# EAGLE board avr-grundschaltung (EAGLE 4.16)
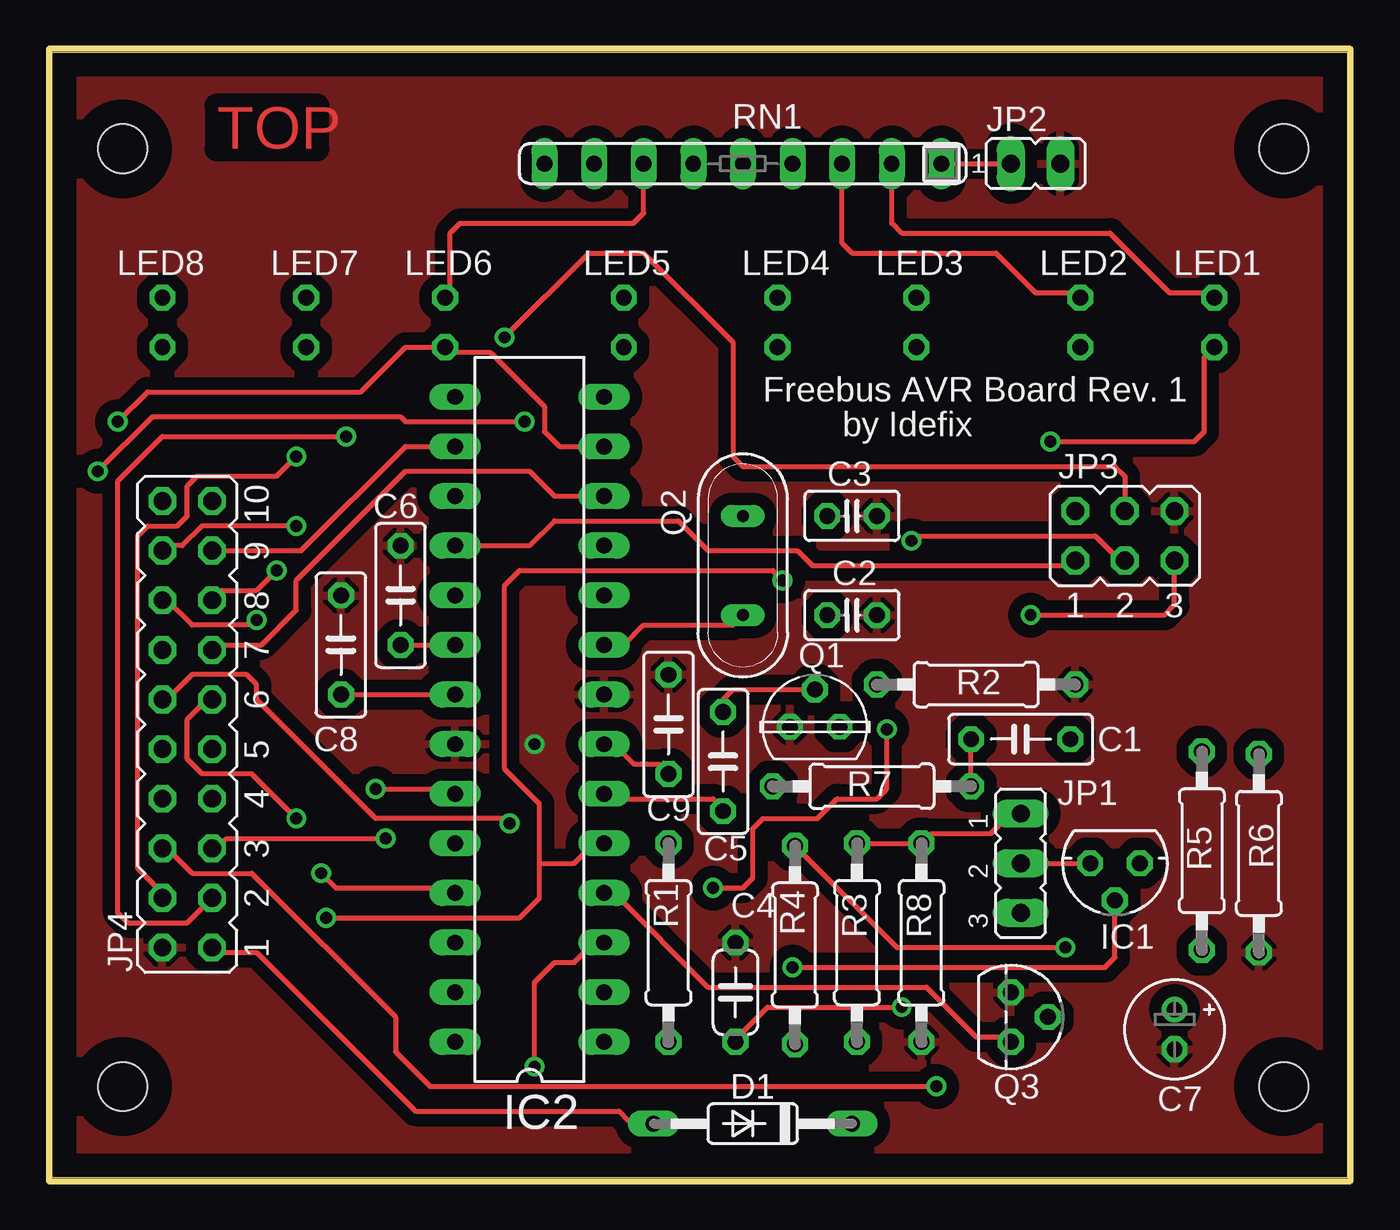
[diagram p0: board, top side]
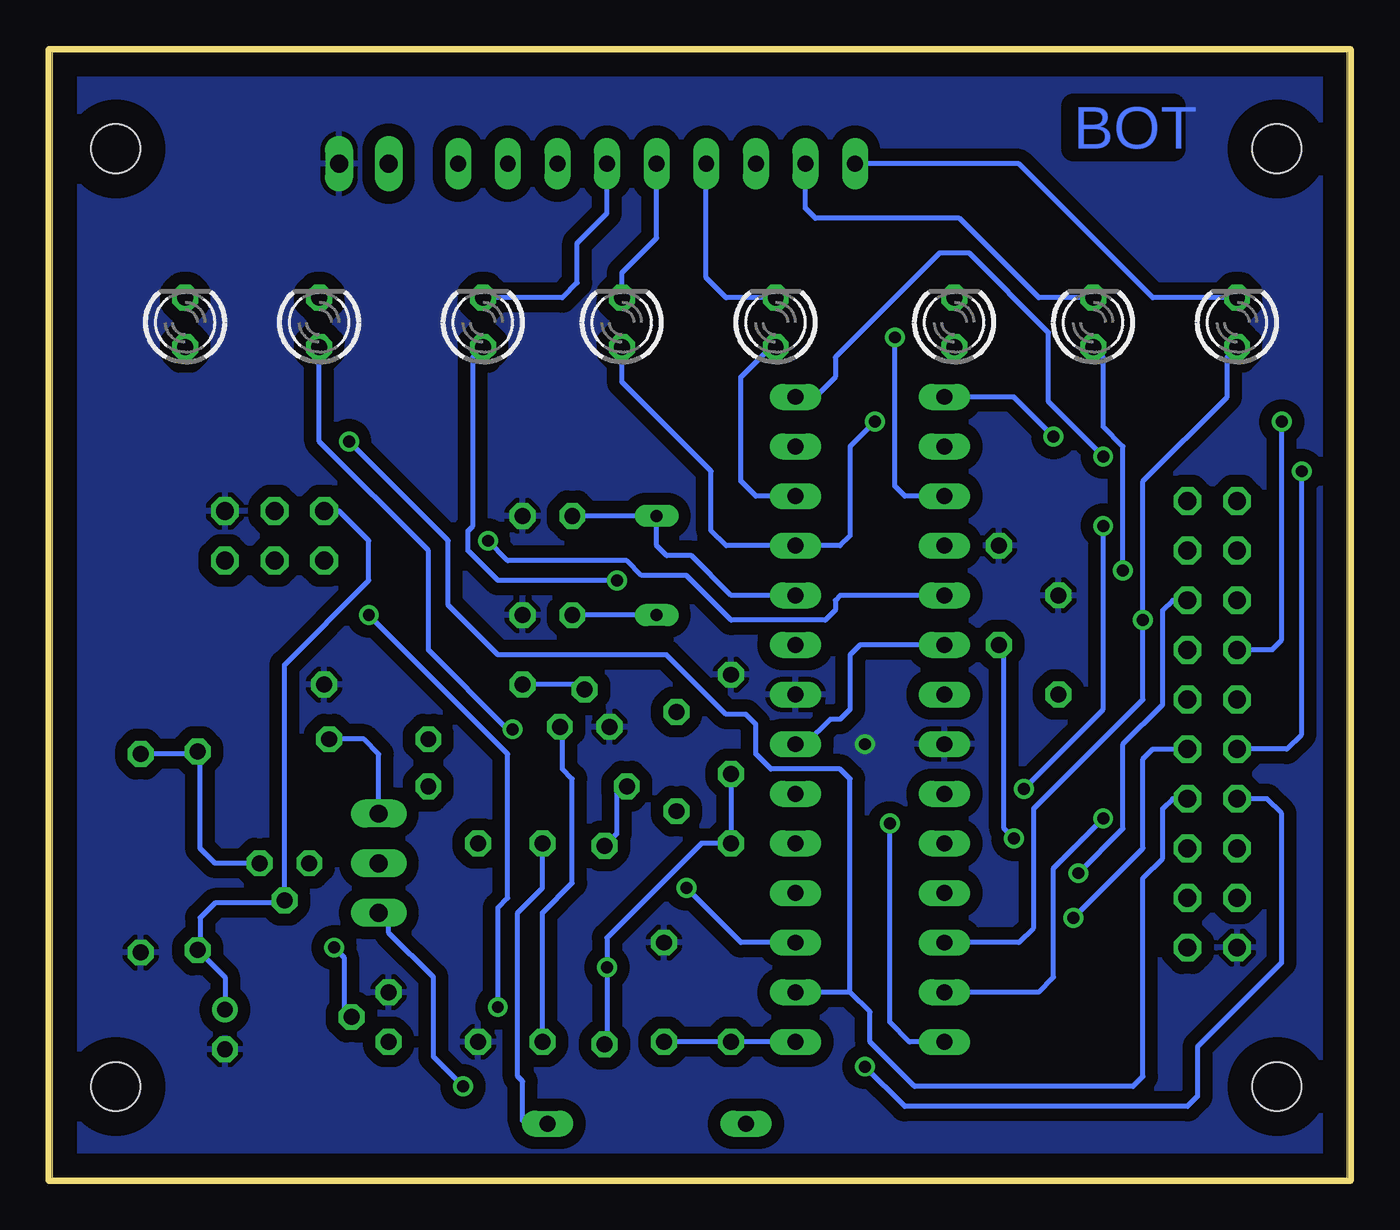
[diagram p1: board, bottom side, seen from below]

Size 66.65 x 57.97 mm. Coordinates in mm from the lower left corner, seen from the top.
Outline: 0,57.97 0,0 66.65,0 66.65,57.97 0,57.97
Copper layers (1*16): Top 0.035mm / dielectric 1.5mm / Bottom 0.035mm
Design rules "freebus-default": minimum track width 10mil, minimum drill 24mil, track to track 25mil, track to pad 15mil, pad to pad 8mil, via to via 50mil, smd to smd 8mil, copper to edge 50mil, drill to drill 50mil, minimum pad ring 10mil, minimum via ring 8mil, stop-mask expansion 4mil, vias tented up to drill 0mil, thermal gap 10mil
Holes 2.5 mm at 3.78,4.84 3.78,52.85 63.22,4.84 63.22,52.85
Milling: 4 lines

## Footprints (pad centres in the part's own frame; a part is rotated, then mirrored left to right if it is on the bottom)
C050-025X075 = drill 0.813 octagon: 1 -2.54,0; 2 2.54,0
C025-025X050 = drill 0.813 octagon: 1 -1.27,0; 2 1.27,0
C050-024X044 = drill 0.813 octagon: 1 -2.54,0; 2 2.54,0
E2-5 = drill 0.813 pad 1.27 round: + -1.016,0 | drill 0.813 pad 1.27 octagon: - 1.016,0
DO35-10 = drill 0.813 long: A 5.08,0; C -5.08,0
317L = drill 0.813 octagon: 1 -1.27,0; 2 0,1.905; 3 1.27,0
DIL28-3 = drill 0.813 long: 1 -16.51,-3.81; 2 -13.97,-3.81; 3 -11.43,-3.81; 4 -8.89,-3.81; 5 -6.35,-3.81; 6 -3.81,-3.81; 7 -1.27,-3.81; 8 1.27,-3.81; 9 3.81,-3.81; 10 6.35,-3.81; 11 8.89,-3.81; 12 11.43,-3.81; 13 13.97,-3.81; 14 16.51,-3.81; 15 16.51,3.81; 16 13.97,3.81; 17 11.43,3.81; 18 8.89,3.81; 19 6.35,3.81; 20 3.81,3.81; 21 1.27,3.81; 22 -1.27,3.81; 23 -3.81,3.81; 24 -6.35,3.81; 25 -8.89,3.81; 26 -11.43,3.81; 27 -13.97,3.81; 28 -16.51,3.81
JP2 = drill 0.914 long: 1 -2.54,0; 2 0,0; 3 2.54,0
JP1 = drill 0.914 long: 1 0,-1.27; 2 0,1.27
JP3Q = drill 0.914 octagon: 1 -2.54,-1.27; 2 -2.54,1.27; 3 0,-1.27; 4 0,1.27; 5 2.54,-1.27; 6 2.54,1.27
JP10Q = drill 0.914 octagon: 1 -11.43,-1.27; 2 -11.43,1.27; 3 -8.89,-1.27; 4 -8.89,1.27; 5 -6.35,-1.27; 6 -6.35,1.27; 7 -3.81,-1.27; 8 -3.81,1.27; 9 -1.27,-1.27; 10 -1.27,1.27; 11 1.27,-1.27; 12 1.27,1.27; 13 3.81,-1.27; 14 3.81,1.27; 15 6.35,-1.27; 16 6.35,1.27; 17 8.89,-1.27; 18 8.89,1.27; 19 11.43,-1.27; 20 11.43,1.27
LED3MM = drill 0.813 octagon: A -1.27,0; K 1.27,0
TO237 = drill 0.813 octagon: 1 1.27,0; 2 0,1.905; 3 -1.27,0
QS = drill 0.61 long: 1 -2.54,0; 2 2.54,0
TO92 = drill 0.813 octagon: 1 1.27,0; 2 0,1.905; 3 -1.27,0
0207/10 = drill 0.813 octagon: 1 -5.08,0; 2 5.08,0
SIL9 = drill 0.813 long: 1 -10.16,0; 2 -7.62,0; 3 -5.08,0; 4 -2.54,0; 5 0,0; 6 2.54,0; 7 5.08,0; 8 7.62,0; 9 10.16,0

## Placement (x,y rotation side)
C1  100n  [C050-025X075]  49.76,22.62 180 top
C2  33p  [C025-025X050]  41.12,28.97 180 top
C3  33p  [C025-025X050]  41.12,34.05 180 top
C4  47n  [C050-024X044]  35.15,9.67 270 top
C5  100n  [C050-025X075]  34.52,21.48 270 top
C6  100n  [C050-025X075]  18.01,29.99 90 top
C7  1u  [E2-5]  57.63,7.76 270 top
C8  100n  [C050-025X075]  14.96,27.45 90 top
C9  100n  [C050-025X075]  31.72,23.39 270 top
D1  1N4148  [DO35-10]  36.04,2.94 180 top
IC1  LM317  [317L]  54.58,16.27 180 top
IC2  MEGA8-P  [DIL28-3]  24.61,23.64 90 top
JP1  [JP2]  49.76,16.27 270 top
JP2  [JP1]  50.52,52.09 270 top
JP3  [JP3Q]  55.09,33.04 0 top
JP4  [JP10Q]  7.08,23.39 90 top
LED1  [LED3MM]  59.66,43.96 90 bottom
LED2  [LED3MM]  52.8,43.96 90 bottom
LED3  [LED3MM]  44.42,43.96 90 bottom
LED4  [LED3MM]  37.31,43.96 90 bottom
LED5  [LED3MM]  29.44,43.96 90 bottom
LED6  [LED3MM]  20.29,43.96 90 bottom
LED7  [LED3MM]  13.18,43.96 90 bottom
LED8  [LED3MM]  5.81,43.96 90 bottom
Q1  2N7000  [TO237]  39.21,23.26 0 top
Q2  8,000  [QS]  35.53,31.51 270 top
Q3  BC557  [TO92]  49.25,8.4 270 top
R1  10k  [0207/10]  31.72,12.21 270 top
R2  470k  [0207/10]  47.47,25.42 180 top
R3  68R  [0207/10]  41.37,12.21 270 top
R4  47k  [0207/10]  38.2,12.08 90 top
R5  430R  [0207/10]  59.03,16.91 90 top
R6  550R  [0207/10]  61.95,16.78 270 top
R7  10k  [0207/10]  42.14,20.21 180 top
R8  100k  [0207/10]  44.68,12.21 270 top
RN1  470R  [SIL9]  35.53,52.09 180 top

## Library data of the parts
C1-C9 R1-R8 = rcl
D1 = diode
IC1 = v-reg
IC2 = atmel
JP1-JP4 = jumper
LED1-LED8 = led
Q1 = transistor-fet
Q2 = special
Q3 = transistor-pnp
RN1 = resistor-sil

## Nets
EIB+: D1.A JP4.1
EIB_IN: IC2.4 Q3.1
EIB_OUT: C5.2 IC2.6
GND: C2.1 C3.1 C4.1 C6.2 C7.- C8.2 C9.1 IC2.8 IC2.22 JP2.2 JP3.6 JP4.2 Q1.3 Q3.3 R2.1 R6.2 R8.2
MISO: IC2.18 JP3.1
MOSI: IC2.17 JP3.4
N$1 [supply]: C1.2 R7.1
N$2: IC1.1 R5.2 R6.1
N$3 [supply]: C1.1 D1.C JP1.1 R3.1 R8.1
N$4: LED8.K RN1.9
N$5 [supply]: Q1.1 R3.2
N$6 [supply]: IC1.3 JP1.2
N$7 [supply]: Q3.2 R4.2 R7.2
N$8: C2.2 IC2.9 Q2.2
N$9: C3.2 IC2.10 Q2.1
N$10: LED7.K RN1.8
N$11: LED6.K RN1.7
N$13: LED5.K RN1.6
N$14: LED4.K RN1.5
N$15: LED3.K RN1.4
N$16: LED2.K RN1.3
N$17: LED1.K RN1.2
N$18: JP2.1 RN1.1
N$23: C5.1 Q1.2 R2.2
N$24: C8.1 IC2.21
OC1A/PWM1: IC2.15 JP4.3
PB0: IC2.14 JP4.4
PB2/OC1B: IC2.16 JP4.17
PC0/ADC0: IC2.23 JP4.18
PC2/ADC2: IC2.25 JP4.15 LED7.A
PC3/ADC3: IC2.26 JP4.16 LED8.A
PC4/ADC4/SDA: IC2.27 JP4.11
PC5/ADC5/SCL: IC2.28 JP4.12
PD0/RXD: IC2.2 JP4.7 LED1.A
PD1/TXD: IC2.3 JP4.8 LED2.A
PD3/INT1: IC2.5 JP4.9 LED3.A
PD5/T1: IC2.11 JP4.10 LED4.A
PD6/AIN0: IC2.12 JP4.13 LED5.A
PD7/AIN1: IC2.13 JP4.14 LED6.A
RESET: C4.2 IC2.1 JP3.5 R1.2
SCK: IC2.19 JP3.3
VCC: C6.1 C7.+ C9.2 IC1.2 IC2.7 IC2.20 JP3.2 JP4.5 R1.1 R4.1 R5.1
VEXT [supply]: JP1.3 JP4.6

## Tracks (layer width: path | path; a pad name or v marks a point on that pad's centre or on a via)
EIB+
  Top 0.254: D1.A 29.69,3.07 29.18,3.57 18.77,3.57 10.64,11.7 8.61,11.7 JP4.1
EIB_IN
  Top 0.254: IC2.4 28.93,14.75 33.75,9.92 44.93,9.92 47.47,7.38 48.99,7.38 Q3.1
EIB_OUT
  Top 0.254: IC2.6 28.67,19.58 34.01,19.58 C5.2
GND  (via drill 0.61 pad 1.02)
  other vias: 24.86,22.37
  pour Bottom: 0.48,57.42 66.01,57.42 66.01,0.53 0.48,0.53
  pour Top: 66.01,57.42 0.48,57.42 0.48,0.53 66.01,0.53
MISO
  Top 0.254: IC2.18 24.61,32.53 25.88,33.8 32.23,33.8 33.75,32.28 38.33,32.28 39.09,31.51 52.3,31.51 JP3.1
MOSI  (via drill 0.61)
  Top 0.254: v23.34,43.2 27.66,47.52 30.45,47.52 35.02,42.94 35.02,37.1 35.53,36.59 54.58,36.59 55.09,36.09 JP3.4
  Bottom 0.254: v23.34,43.2 23.34,35.58 22.83,35.07 IC2.17
N$1
  Top 0.254: R7.1 C1.2
N$2
  Bottom 0.254: IC1.1 58.14,16.27 58.9,17.04 58.9,21.86 R5.2 59.15,21.86 R6.1
N$3
  Top 0.254: R3.1 R8.1 45.18,17.8 48.23,17.8 49.25,18.81 JP1.1
  Bottom 0.254: C1.1 50.52,22.62 49.76,21.86 JP1.1 | D1.C 42.39,3.07 42.39,5.1 42.64,5.35 42.64,13.73 41.37,15 R3.1
N$4
  Bottom 0.254: LED8.K 10.13,45.23 16.99,52.09 RN1.9
N$5
  Bottom 0.254: 41.37,6.88 R3.2 41.37,13.73 39.85,15.26 39.85,20.59 40.36,21.1 40.36,23.13 Q1.1
N$6
  Top 0.254: JP1.2 IC1.3
N$7  (via drill 0.61)
  Top 0.254: v52.04,11.96 43.41,11.96 R4.2
  Bottom 0.254: R4.2 37.56,17.8 37.56,19.83 R7.2 | v52.04,11.96 51.53,11.45 51.53,8.4 Q3.2
N$8
  Top 0.254: IC2.9 29.44,27.45 30.45,28.47 35.02,28.47 Q2.2
  Bottom 0.254: Q2.2 C2.2
N$9
  Bottom 0.254: C3.2 Q2.1 35.53,32.53 35.02,32.02 33.75,32.02 31.72,29.99 IC2.10
N$10
  Bottom 0.254: LED7.K 15.97,45.23 20.04,49.29 27.4,49.29 27.91,49.8 RN1.8
N$11
  Top 0.254: LED6.K 20.55,45.48 20.55,48.53 21.05,49.04 29.94,49.04 30.45,49.55 RN1.7
N$13
  Bottom 0.254: LED5.K 31.98,45.23 32.99,46.25 RN1.6
N$14
  Bottom 0.254: 37.31,44.98 LED4.K 37.31,46.5 35.53,48.28 RN1.5
N$15
  Bottom 0.254: LED3.K 40.36,45.23 39.6,45.99 39.6,48.02 38.07,49.55 RN1.4
N$16
  Top 0.254: RN1.3 40.61,48.02 41.12,47.52 48.49,47.52 50.52,45.48 52.55,45.48 LED2.K
N$17
  Top 0.254: RN1.2 43.15,49.04 43.66,48.53 54.33,48.53 57.38,45.48 59.41,45.48 LED1.K
N$18
  Top 0.254: RN1.1 JP2.1
N$23
  Top 0.254: C5.1 34.52,24.66 35.02,25.16 Q1.2
  Bottom 0.254: R2.2 39.34,25.42 Q1.2
N$24
  Top 0.254: C8.1 IC2.21
OC1A/PWM1  (via drill 0.61)
  Top 0.254: v15.21,38.12 5.81,38.12 3.53,35.83 3.53,13.73 4.04,13.23 7.08,13.23 JP4.3
  Bottom 0.254: v15.21,38.12 17.24,40.15 IC2.15
PB0  (via drill 0.61)
  Top 0.254: v12.67,37.1 11.66,36.09 7.59,36.09 7.08,35.58 7.08,34.05 6.58,33.55 5.05,33.55 4.54,33.04 4.54,16.02 5.81,14.75 JP4.4
  Bottom 0.254: v12.67,37.1 15.47,39.9 15.47,43.45 19.53,47.52 21.05,47.52 26.39,42.18 26.39,41.17 27.4,40.15 IC2.14
PB2/OC1B
  Top 0.254: IC2.16 18.26,37.61 12.93,32.28 JP4.17
PC0/ADC0  (via drill 0.61)
  Top 0.254: v16.74,20.08 20.55,20.08 IC2.23 | v12.67,33.55 7.85,33.55 6.83,32.53 6.07,32.53 JP4.18
  Bottom 0.254: v16.74,20.08 12.67,24.15 v12.67,33.55
PC2/ADC2  (via drill 0.61)
  Top 0.254: v13.94,15.77 14.7,15 20.55,15 IC2.25 | v11.66,31.26 10.64,30.24 8.86,30.24 JP4.15
  Bottom 0.254: v13.94,15.77 11.66,18.05 11.66,22.37 9.62,24.4 9.62,29.23 9.12,29.74 JP4.15 | v11.66,31.26 11.66,37.61 12.67,38.63 12.67,42.18 LED7.A
PC3/ADC3  (via drill 0.61)
  Top 0.254: v10.64,28.72 10.39,28.47 7.34,28.47 6.07,29.74 JP4.16
  Bottom 0.254: IC2.26 16.99,12.21 16.23,12.97 16.23,19.07 10.64,24.66 v10.64,28.72 10.64,35.83 6.32,40.15 6.32,42.18 LED8.A
PC4/ADC4/SDA  (via drill 0.61)
  Top 0.254: v12.67,18.56 10.39,20.85 7.85,20.85 7.08,21.61 7.08,23.64 8.1,24.66 JP4.11
  Bottom 0.254: v12.67,18.56 15.21,16.02 15.21,10.43 15.97,9.67 IC2.27
PC5/ADC5/SCL  (via drill 0.61)
  Top 0.254: v23.59,18.31 23.34,18.56 16.74,18.56 10.64,24.66 10.64,25.42 10.13,25.93 7.34,25.93 6.07,24.66 JP4.12
  Bottom 0.254: v23.59,18.31 23.59,8.15 22.58,7.13 IC2.28
PD0/RXD  (via drill 0.61)
  Top 0.254: v51.28,37.86 58.65,37.86 59.15,38.37 59.15,42.18 LED1.A
  Bottom 0.254: 25.63,9.67 24.61,8.65 24.61,7.13 22.32,4.84 11.15,4.84 10.64,5.35 10.64,15.51 9.62,16.53 9.62,19.07 9.12,19.58 JP4.7 | 25.63,9.67 IC2.2 | v51.28,37.86 46.2,32.78 46.2,29.48 43.66,26.94 35.02,26.94 31.98,23.89 30.96,23.89 30.45,23.39 30.45,21.86 29.69,21.1 26.13,21.1 25.63,20.59 25.63,9.67
PD1/TXD  (via drill 0.61)
  Top 0.254: v24.86,5.86 24.86,10.18 25.88,11.19 26.9,11.19 27.91,12.21 IC2.3 | v42.9,23.13 42.9,20.08 42.39,19.58 40.36,19.58 39.34,18.56 36.55,18.56 36.04,18.05 36.04,15.51 35.53,15 v34.01,15
  Bottom 0.254: v24.86,5.86 22.83,3.83 8.35,3.83 7.85,4.34 7.85,6.88 3.53,11.19 3.53,18.81 4.29,19.58 JP4.8 | v42.9,23.13 43.15,23.13 47.22,27.2 47.22,32.28 52.8,37.86 LED2.A 52.8,42.94 | v34.01,15 31.21,12.21 IC2.3
PD3/INT1  (via drill 0.61)
  Top 0.254: 25.12,16.27 26.9,16.27 27.91,17.29 IC2.5 | 25.12,16.27 25.12,14.5 24.1,13.48 v14.2,13.48 | v37.56,30.75 37.06,31.26 24.1,31.26 23.34,30.5 23.34,21.1 25.12,19.32 25.12,16.27
  Bottom 0.254: v14.2,13.48 10.64,17.04 10.64,21.61 10.13,22.12 JP4.9 | v37.56,30.75 43.66,30.75 45.18,32.28 45.18,33.29 44.93,33.55 44.93,42.18 LED3.A
PD5/T1  (via drill 0.61)
  Top 0.254: v2.51,36.34 5.31,39.13 18.01,39.13 18.26,38.88 v24.36,38.88
  Bottom 0.254: LED4.A 37.31,40.91 32.74,36.34 32.74,33.29 31.98,32.53 IC2.11 26.13,32.53 25.63,33.04 25.63,37.61 v24.36,38.88 | v2.51,36.34 2.51,22.88 3.27,22.12 JP4.10
PD6/AIN0
  Top 0.254: IC2.12 25.88,35.07 24.61,36.34 18.26,36.34 12.67,30.75 12.67,29.23 10.89,27.45 8.61,27.45 JP4.13
  Bottom 0.254: IC2.12 30.45,35.07 31.21,35.83 31.21,41.17 29.69,42.69 LED5.A
PD7/AIN1  (via drill 0.61)
  Top 0.254: IC2.13 26.13,37.61 25.37,38.37 25.37,39.64 22.58,42.44 20.55,42.44 LED6.A 18.26,42.69 15.97,40.4 5.05,40.4 v3.53,38.88
  Bottom 0.254: v3.53,38.88 3.53,27.7 4.04,27.2 JP4.14
RESET  (via drill 0.61)
  Top 0.254: v50.26,28.97 57.12,28.97 57.63,29.48 JP3.5 | v43.66,8.91 36.8,8.91 35.02,7.13 C4.2
  Bottom 0.254: IC2.1 R1.2 C4.2 | v50.26,28.97 43.15,21.86 43.15,14.5 43.66,13.99 v43.66,8.91
SCK  (via drill 0.61)
  Top 0.254: v44.17,32.78 44.42,33.04 53.57,33.04 54.84,31.77 JP3.3
  Bottom 0.254: v44.17,32.78 43.15,31.77 37.06,31.77 36.29,31.01 34.01,31.01 31.72,28.72 26.9,28.72 26.39,29.23 26.39,29.74 26.13,29.99 IC2.19
VCC  (via drill 0.61)
  Top 0.254: C6.1 IC2.20 | v17.24,17.54 9.12,17.54 8.61,17.04 JP4.5 | IC2.7 28.93,22.37 29.94,21.35 31.21,21.35 C9.2 | v38.07,10.94 54.07,10.94 54.58,11.45 IC1.2
  Bottom 0.254: 57.63,8.65 C7.+ 57.63,10.43 R5.1 58.9,11.96 58.9,13.48 58.14,14.24 54.58,14.24 IC1.2 54.58,26.43 50.26,30.75 50.26,32.78 51.79,34.31 JP3.2 | v17.24,17.54 17.75,18.05 17.75,27.2 C6.1 | R1.1 33.25,17.29 38.07,12.46 v38.07,10.94 38.07,7.13 R4.1 | R1.1 31.47,17.29 | C9.2 R1.1 | IC2.20 25.12,27.45 25.63,26.94 25.63,24.15 26.13,23.64 26.64,23.64 27.91,22.37 IC2.7
VEXT  (via drill 0.61)
  Top 0.254: v45.44,4.84 19.53,4.84 17.75,6.62 17.75,8.4 10.39,15.77 7.34,15.77 6.07,17.04 JP4.6
  Bottom 0.254: v45.44,4.84 46.96,6.37 46.96,10.43 49.25,12.72 49.25,13.73 JP1.3

## Text on the board
Top: TOP
Bottom: BOT
tNames: Freebus AVR Board Rev. 1 | by Idefix